# EAGLE board source_eagle (EAGLE 9.6.2)
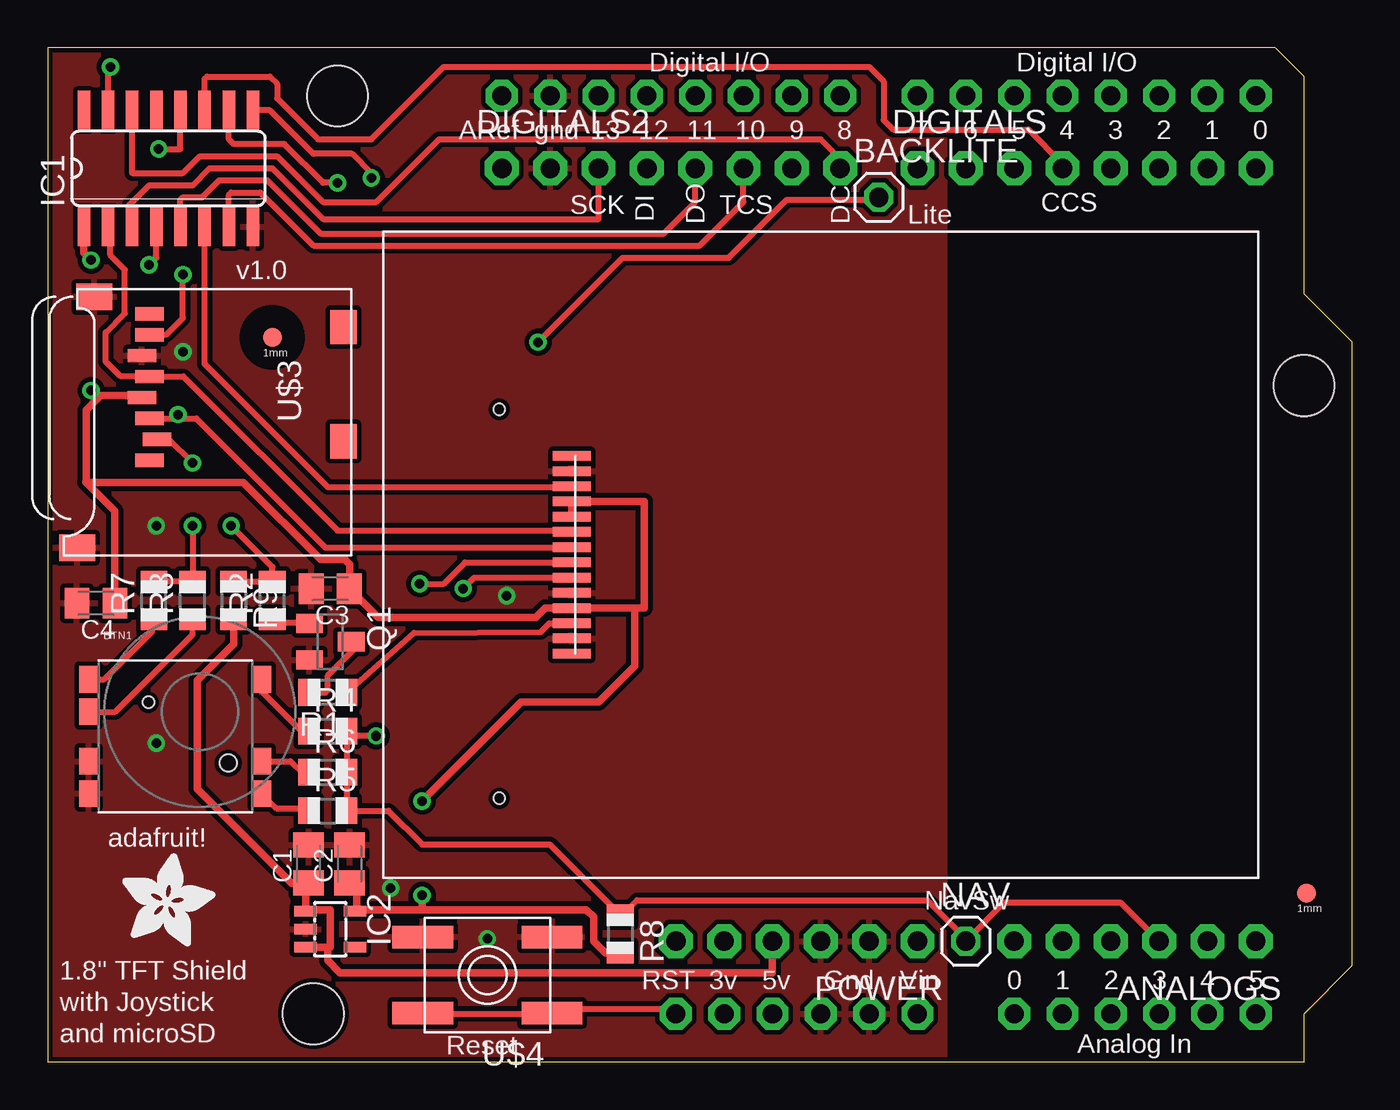
[diagram p0: board, top side]
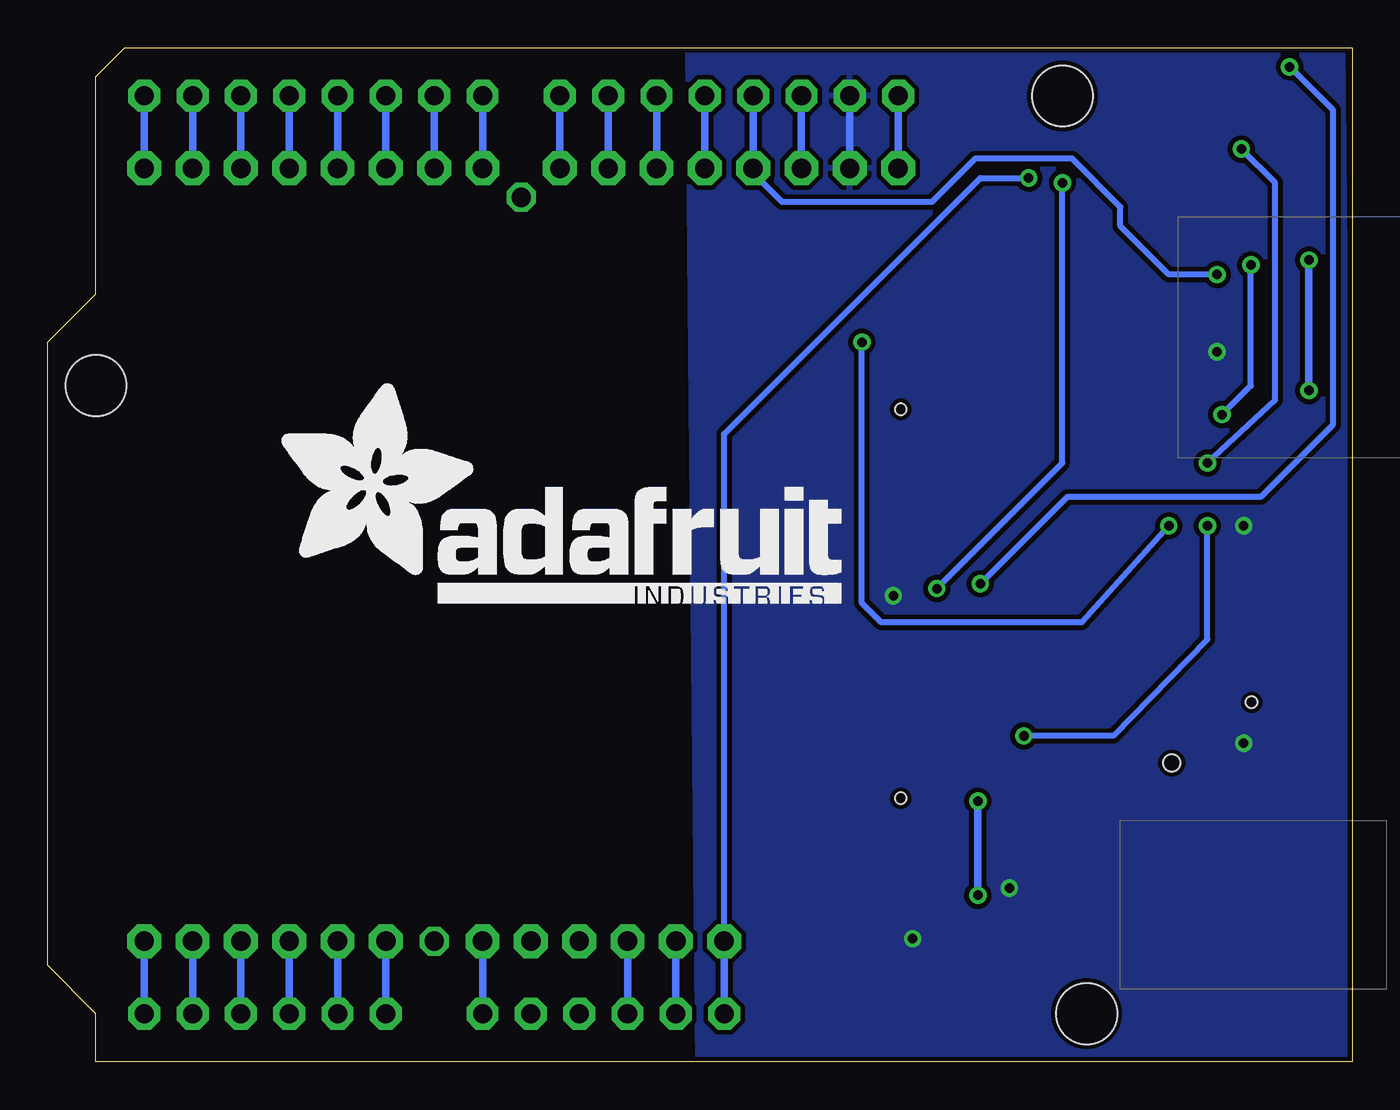
[diagram p1: board, bottom side, seen from below]

Size 68.58 x 53.34 mm. Coordinates in mm from the lower left corner, seen from the top.
Copper layers (1*16): Top 0.035mm / dielectric 1.5mm / Bottom 0.035mm
Design rules "10-10mil": minimum track width 10mil, minimum drill 19mil, track to track 10mil, track to pad 10mil, pad to pad 10mil, via to via 10mil, smd to smd 8mil, copper to edge 10mil, drill to drill 8mil, minimum pad ring 10mil, minimum via ring 8mil, stop-mask expansion 4mil, vias tented up to drill 20mil, thermal gap 10mil
Net classes: 1 power: width 0.406 mm

## Footprints (pad centres in the part's own frame; a part is rotated, then mirrored left to right if it is on the bottom)
1X06-CLEANBIG = drill 1.016 pad 1.778 octagon: 1 -6.35,0; 2 -3.81,0; 3 -1.27,0; 4 1.27,0; 5 3.81,0; 6 6.35,0
1X01 = drill 1.016 octagon: 1 0,0
SWITCH_4WAY_TPA511GLFS = smd 1 x 1.4: COMMON1 -5.825,-4.3; COMMON2 -5.825,-2.6; DOWN/4 3.25,-4.3; LEFT/7 -5.825,1.7; RIGHT/6 -5.825,0; SELECT/5 3.25,1.7; UP/3 3.25,-2.6 | hole 0.6: -2.7,0.5 | hole 0.9: 1.5,-2.7
C0805K = smd 1.3 x 1.6: 1 -1,0; 2 1,0
1X08-CLEANBIG = drill 1.016 pad 1.778 octagon: 1 -8.89,0; 2 -6.35,0; 3 -3.81,0; 4 -1.27,0; 5 1.27,0; 6 3.81,0; 7 6.35,0; 8 8.89,0
FIDUCIAL-1X2.5 = smd 1 x 1: 1 0,0
SO16 = smd 0.66 x 2.032: 1 -4.445,-3.073; 2 -3.175,-3.073; 3 -1.905,-3.073; 4 -0.635,-3.073; 5 0.635,-3.073; 6 1.905,-3.073; 7 3.175,-3.073; 8 4.445,-3.073; 9 4.445,3.073; 10 3.175,3.073; 11 1.905,3.073; 12 0.635,3.073; 13 -0.635,3.073; 14 -1.905,3.073; 15 -3.175,3.073; 16 -4.445,3.073
SOT23-5L = smd 0.55 x 1.2: 1 -0.95,-1.3; 2 0,-1.3; 3 0.95,-1.3; 4 0.95,1.3; 5 -0.95,1.3
SOT23-BEC = smd 1 x 1.4: B -0.95,-1.1; C 0,1.1; E 0.95,-1.1
R0805 = smd 1.1 x 1.4: 1 -1,0; 2 1,0
JD-T1800 = smd 0.5 x 2: 1 5.2,-13.1; 2 4.4,-13.1; 3 3.6,-13.1; 4 2.8,-13.1; 5 2,-13.1; 6 1.2,-13.1; 7 0.4,-13.1; 8 -0.4,-13.1; 9 -1.2,-13.1; 10 -2,-13.1; 11 -2.8,-13.1; 12 -3.6,-13.1; 13 -4.4,-13.1; 14 -5.2,-13.1 | hole 0.6: -7.65,-16.9; 12.8,-16.9
ARDUINO = drill 1 pad 1.676 octagon: 3V 35.56,2.54; 5V 38.1,2.54; A0 50.8,2.54; A1 53.34,2.54; A2 55.88,2.54; A3 58.42,2.54; A4 60.96,2.54; A5 63.5,2.54; AREF 23.876,50.8; D0 63.5,50.8; D1 60.96,50.8; D2 58.42,50.8; D3 55.88,50.8; D4 53.34,50.8; D5 50.8,50.8; D6 48.26,50.8; D7 45.72,50.8; D8 41.656,50.8; D9 39.116,50.8; D10 36.576,50.8; D11 34.036,50.8; D12 31.496,50.8; D13 28.956,50.8; GND 26.416,50.8; GND1 43.18,2.54; GND2 40.64,2.54; RESET 33.02,2.54; VIN 45.72,2.54 | hole 3.2: 15.24,50.8; 66.04,35.56; 13.97,2.54
MICROSD = smd 0.7 x 1.5: 1 9,-10.64; 2 7.9,-10.24; 3 6.8,-10.64; 4 5.7,-11.04; 5 4.6,-10.64; 6 3.5,-11.04; 7 2.4,-10.64; 8 1.3,-10.64 | smd 1.8 x 1.4: CD1 2,-0.44; CD2 8,-0.44 | smd 1.4 x 1.9: MT1 0.4,-13.54; MT2 13.6,-14.44
EVQ-Q2 = smd 3.2 x 1.2: A -3.4,-2; A' 3.4,-2; B -3.4,2; B' 3.4,2

## Placement (x,y rotation side)
ANALOGS  [1X06-CLEANBIG]  57.15,6.35 180 top
BACKLITE  [1X01]  43.69,45.47 0 top
BTN1  [SWITCH_4WAY_TPA511GLFS]  8,18.41 0 top
C1  10uF  [C0805K]  13.72,10.41 90 top
C2  10uF  [C0805K]  15.88,10.41 90 top
C3  0.1uF  [C0805K]  14.86,24.89 180 top
C4  0.1uF  [C0805K]  2.54,24.13 180 top
DIGITALS  [1X08-CLEANBIG]  54.61,46.99 0 top
DIGITALS2  [1X08-CLEANBIG]  32.77,46.99 0 top
FID1  FIDUCIAL1X2.5  [FIDUCIAL-1X2.5]  11.81,38.1 0 top
FID3  FIDUCIAL1X2.5  [FIDUCIAL-1X2.5]  66.17,8.89 0 top
IC1  4050D  [SO16]  6.35,46.99 0 top
IC2  RT9193-33GB  [SOT23-5L]  14.86,6.99 270 top
NAV  [1X01]  48.26,6.35 0 top
POWER  [1X06-CLEANBIG]  39.37,6.35 180 top
Q1  2N2222  [SOT23-BEC]  14.86,22.1 270 top
R1  22 ohm  [R0805]  14.73,19.43 180 top
R2  1K  [R0805]  11.81,24.26 90 top
R3  1.0K  [R0805]  7.62,24.26 90 top
R4  470 ohm  [R0805]  14.73,17.4 0 top
R5  220 ohm  [R0805]  14.73,13.21 0 top
R6  10K  [R0805]  14.73,15.24 0 top
R7  22 ohm  [R0805]  5.59,24.26 90 top
R8  1Kohm  [R0805]  30.1,6.73 270 top
R9  1K  [R0805]  9.78,24.26 270 top
U$1  JD-T1800  [JD-T1800]  40.64,26.67 270 top
U$2  ARDUINOUNO  [ARDUINO]  0,0 0 top
U$3  MICROSD  [MICROSD]  16,40.64 270 top
U$4  EVQQ2  [EVQ-Q2]  23.11,4.57 180 top
U$5  [ADAFRUIT_TEXT_30MM]  56.52,24.13 0 bottom
U$6  [ADAFRUIT_5MM]  3.94,6.1 0 top

## Library data of the parts
ANALOGS DIGITALS DIGITALS2 IC2 POWER R1-R9 U$1-U$4 = adafruit
BACKLITE NAV = pinhead
BTN1 FID1 FID3 U$5 U$6 = microbuilder
C1-C4 = rcl
IC1 = 40xx
Q1 = transistor

## Nets
+3V3 [power]: C2.1 C3.1 C4.1 IC1.1 IC2.5 R8.2 U$1.4 U$1.10 U$1.11 U$3.4
+5V [power]: C1.1 IC2.1 IC2.3 POWER.4 R9.2 U$2.5V
CARDCS: IC1.12 U$3.2
CARDCS_5V: DIGITALS.4 IC1.11 U$2.D4
GND: BTN1.COMMON1 BTN1.COMMON2 C1.2 C2.2 C3.2 C4.2 DIGITALS2.2 IC1.8 IC2.2 POWER.2 POWER.3 Q1.E U$1.2 U$1.5 U$1.13 U$2.GND U$2.GND1 U$2.GND2 U$3.6 U$3.MT1 U$3.MT2 U$4.A U$4.A'
MISO: DIGITALS2.4 U$2.D12 U$3.7
MOSI: IC1.4 U$1.8 U$3.3
MOSI_5V: DIGITALS2.5 IC1.5 U$2.D11
N$1: Q1.B R2.1
N$2: BTN1.LEFT/7 R7.1
N$3: BTN1.DOWN/4 R5.1
N$4: R1.1 U$1.3
N$5: Q1.C R1.2
N$6: DIGITALS2.7 U$2.D9
N$7: BTN1.SELECT/5 R4.1
N$8: BTN1.RIGHT/6 R3.1
N$9: BTN1.UP/3 R6.1
N$10: ANALOGS.3 NAV.1 R3.2 R4.2 R5.2 R6.2 R7.2 R8.1 U$2.A3
N$11: DIGITALS.1 U$2.D7
N$12: DIGITALS.2 U$2.D6
N$13: DIGITALS.3 U$2.D5
N$14: DIGITALS.5 U$2.D3
N$15: DIGITALS.6 U$2.D2
N$16: DIGITALS.7 U$2.D1
N$17: DIGITALS.8 U$2.D0
N$18: DIGITALS2.1 U$2.AREF
N$19: ANALOGS.1 U$2.A5
N$20: ANALOGS.2 U$2.A4
N$21: ANALOGS.4 U$2.A2
N$22: ANALOGS.5 U$2.A1
N$23: ANALOGS.6 U$2.A0
N$24: POWER.1 U$2.VIN
N$25: POWER.5 U$2.3V
N$26: BACKLITE.1 R2.2 R9.1
RESET_5V: IC1.9 POWER.6 U$2.RESET U$4.B U$4.B'
SCK: IC1.2 U$1.9 U$3.5
SCK_5V: DIGITALS2.3 IC1.3 U$2.D13
TFTCS: IC1.6 U$1.12
TFTCS_5V: DIGITALS2.6 IC1.7 U$2.D10
TFTDC: IC1.15 U$1.7
TFTDC_5V: DIGITALS2.8 IC1.14 U$2.D8
TFTRESET: IC1.10 U$1.6

## Tracks (layer width: path | path; a pad name or v marks a point on that pad's centre or on a via)
+3V3  (via drill 0.5)
  Top 0.406: C4.1 3.54,28.97 2.03,30.48 | 2.03,30.48 2.03,34.29 2.67,34.92 | 2.67,34.92 2.79,35.05 4.85,35.05 U$3.4 | IC1.1 1.91,42.55 v2.29,42.16 | 2.67,34.92 v2.29,35.31 | C2.1 16.26,9.03 16.26,8 16.23,8 IC2.5 16.13,7.96 16.13,8 19.68,8 | R8.2 29.32,5.73 28.7,6.35 28.7,7.62 28.32,8 19.68,8 | U$1.11 27.55,29.47 27.56,29.46 27.54,29.45 U$1.10 U$1.11 31.37,29.46 31.37,23.88 30.86,23.88 | 27.56,23.88 27.81,23.88 | U$1.4 26.16,23.88 25.65,23.37 17.38,23.37 C3.1 15.88,24.91 15.88,26.16 15.62,26.42 14.35,26.42 10.29,30.48 2.14,30.48 2.02,30.5 2.03,30.48 | 27.56,23.88 U$1.4 | U$1.4 | 30.86,23.88 27.56,23.88 | 30.86,23.88 30.86,20.83 28.96,18.92 24.89,18.92 v19.68,13.72 | 19.68,8 v19.68,8.76
  Bottom 0.406: v2.29,35.31 v2.29,42.16 | v19.68,8.76 v19.68,13.72
+5V
  Top 0.406: 38.1,6.48 POWER.4 38.1,4.7 15.37,4.7 14.73,5.33 14.73,6.04 | 13.72,9.4 13.84,9.4 | IC2.3 14.73,6.04 | 14.73,6.04 14.86,6.04 14.86,8 13.56,8 | 13.56,8 13.46,8 | 13.56,8 IC2.1 | R9.2 9.78,21.97 7.87,20.07 7.87,14.35 12.83,9.4 13.72,9.4 | 13.7,9.4 C1.1 13.72,9.4 | 13.56,8 13.56,9.24 13.72,9.4
  Bottom 0.406: POWER.4 U$2.5V
CARDCS  (via drill 0.5)
  Top 0.305: IC1.12 6.99,48.01 v5.84,48.01 | v7.62,31.5 6.35,32.77 5.59,32.77 5.61,32.74 U$3.2
  Bottom 0.305: v5.84,48.01 4.06,46.23 4.06,34.8 v7.62,31.5
CARDCS_5V
  Top 0.305: IC1.11 8.26,51.69 8.38,51.82 11.68,51.82 12.06,51.44 12.06,50.67 14.22,48.51 17.02,48.51 20.83,52.32 43.18,52.32 43.94,51.56 43.94,49.53 44.45,49.02 51.56,49.02 53.34,47.24 DIGITALS.4
  Bottom 0.406: DIGITALS.4 U$2.D4
GND  (via drill 0.5)
  Bottom 0.406: U$2.GND 26.67,50.8 26.42,50.55 DIGITALS2.2
  other vias: 23.11,6.48 7.11,37.34 24.13,24.51 5.71,16.76 5.71,28.19 18.03,9.14
  pour Top: 0,0 0.25,53.34 47.12,52.96 47.12,-0.38
  pour Bottom: 0,0 0.51,53.59 34.92,53.34 34.42,-0.25
MISO  (via drill 0.5)
  Top 0.305: U$3.7 6.24,38.24 7.11,39.12 v7.11,41.4
  Bottom 0.305: v7.11,41.4 9.65,41.4 12.19,43.94 12.19,44.96 14.73,47.5 19.81,47.5 22.1,45.21 29.97,45.21 31.5,46.74 DIGITALS2.4
  Bottom 0.406: U$2.D12 31.75,50.8 31.5,50.55 DIGITALS2.4
MOSI  (via drill 0.5)
  Top 0.305: U$3.3 6.86,33.84 | 6.86,33.84 7.82,33.84 14.61,27.05 27.52,27.05 U$1.8 | IC1.4 5.71,42.29 v5.33,41.91 | 6.86,33.84 6.86,33.78 | 6.86,33.84 v6.86,34.04
  Bottom 0.305: v5.33,41.91 5.33,35.56 v6.86,34.04
MOSI_5V
  Top 0.305: IC1.5 6.99,45.34 7.11,45.47 8.13,45.47 9.02,46.35 11.56,46.35 14.35,43.56 32.38,43.56 34.04,45.21 DIGITALS2.5
  Bottom 0.406: U$2.D11 34.29,50.8 34.04,50.55 DIGITALS2.5
N$1
  Top 0.305: Q1.B 13.72,23.09 13.72,23.11 11.95,23.11 R2.1
N$2
  Top 0.305: R7.1 5.48,22.62 2.97,20.11 BTN1.LEFT/7
N$3
  Top 0.305: R5.1 13.72,13.22 13.72,13.34 12.03,13.34 BTN1.DOWN/4
N$4
  Top 0.305: R1.1 15.75,19.43 19.26,22.56 25.91,22.61 26.37,23.07 U$1.3
N$5
  Top 0.305: R1.2 13.97,19.56 14.1,19.43 14.61,19.43 14.73,19.56 14.73,20.32 16.13,21.72 16.13,22.1 Q1.C 16,22.1
N$6
  Bottom 0.406: U$2.D9 39.37,50.8 39.12,50.55 DIGITALS2.7
N$7
  Top 0.305: R4.1 13.59,17.4 13.46,17.27 11.25,19.48 BTN1.SELECT/5
N$8
  Top 0.305: BTN1.RIGHT/6 3.56,18.41 7.62,22.48 7.64,23.24 | 7.64,23.24 7.75,23.24 | 7.64,23.24 R3.1
N$9
  Top 0.305: R6.1 13.34,15.24 12.76,15.81 BTN1.UP/3
N$10  (via drill 0.5)
  Top 0.305: 5.57,25.27 5.46,25.27 | 5.57,25.27 R7.2 | 5.57,25.27 7.6,25.27 R3.2 v7.62,28.19 | 58.42,6.22 ANALOGS.3 56.39,8.38 50.29,8.38 NAV.1 48.26,6.48 46.23,8.51 30.99,8.51 30.21,7.73 R8.1 26.4,11.43 19.68,11.43 17.91,13.21 R5.2 | R5.2 15.62,13.21 | R6.2 R5.2 | R6.2 15.73,15.37 15.75,15.37 | 15.73,17.27 R4.2 15.73,17.16 15.75,17.14 v17.27,17.14 | 15.73,17.27 R6.2 | 15.73,17.27 15.75,17.27
  Bottom 0.305: v7.62,28.19 7.62,22.23 12.57,17.14 v17.27,17.14
  Bottom 0.406: ANALOGS.3 U$2.A3
N$11
  Bottom 0.406: DIGITALS.1 U$2.D7
N$12
  Bottom 0.406: DIGITALS.2 U$2.D6
N$13
  Bottom 0.406: DIGITALS.3 U$2.D5
N$14
  Bottom 0.406: DIGITALS.5 U$2.D3
N$15
  Bottom 0.406: DIGITALS.6 U$2.D2
N$16
  Bottom 0.406: DIGITALS.7 U$2.D1
N$17
  Bottom 0.406: DIGITALS.8 U$2.D0
N$18
  Bottom 0.406: U$2.AREF 24.13,50.8 23.88,50.55 DIGITALS2.1
N$19
  Bottom 0.406: U$2.A5 ANALOGS.1
N$20
  Bottom 0.406: U$2.A4 ANALOGS.2
N$21
  Bottom 0.406: U$2.A2 ANALOGS.4
N$22
  Bottom 0.406: U$2.A1 ANALOGS.5
N$23
  Bottom 0.406: U$2.A0 ANALOGS.6
N$24
  Bottom 0.406: U$2.VIN POWER.1
N$25
  Bottom 0.406: U$2.3V POWER.5
N$26  (via drill 0.5)
  Top 0.305: R9.1 9.79,25.27 11.81,25.27 R2.2 11.81,26.04 v9.65,28.19 | v25.78,37.85 30.23,42.29 35.81,42.29 38.86,45.34 43.69,45.34 BACKLITE.1
  Bottom 0.305: v9.65,28.19 14.22,23.11 24.77,23.11 25.78,24.13 v25.78,37.85
RESET_5V  (via drill 0.5)
  Top 0.305: U$4.B' 19.75,2.54 26.48,2.54 U$4.B 26.74,2.79 32.77,2.79 U$2.RESET | IC1.9 10.82,50.04 11.68,50.04 13.97,47.75 16,47.75 17.02,46.74 v17.02,46.48
  Bottom 0.305: POWER.6 33.02,33.02 19.56,46.48 v17.02,46.48
  Bottom 0.406: U$2.RESET POWER.6
SCK
  Top 0.305: U$1.9 27.62,27.87 27.69,27.94 15.24,27.94 7.14,36.04 U$3.5 5.33,36.07 3.81,36.07 3.05,36.83 3.05,38.35 4.06,39.37 4.06,41.66 3.3,42.42 3.3,43.79 IC1.2
SCK_5V
  Top 0.305: IC1.3 4.45,44.7 4.32,44.7 4.32,45.09 5.33,46.1 7.62,46.1 8.51,46.99 11.81,46.99 14.48,44.32 28.96,44.32 DIGITALS2.3 28.96,47.24
  Bottom 0.406: U$2.D13 29.21,50.8 28.96,50.55 DIGITALS2.3
TFTCS
  Top 0.305: IC1.6 8.26,36.7 14.73,30.23 27.94,30.23 27.9,30.27 U$1.12
TFTCS_5V
  Top 0.305: IC1.7 9.53,45.59 9.65,45.72 11.18,45.72 13.97,42.93 34.29,42.93 36.58,45.21 DIGITALS2.6
  Bottom 0.406: U$2.D10 36.83,50.8 36.58,50.55 DIGITALS2.6
TFTDC  (via drill 0.5)
  Top 0.305: U$1.7 21.95,26.27 20.83,25.15 v19.56,25.15 | IC1.15 3.17,52.2 v3.3,52.32
  Bottom 0.305: v3.3,52.32 1.02,50.04 1.02,33.53 4.83,29.72 14.99,29.72 v19.56,25.15
TFTDC_5V
  Top 0.305: DIGITALS2.8 41.91,47.24 40.64,48.51 20.57,48.51 17.27,45.21 14.48,45.21 12.06,47.62 8,47.62 7.11,46.74 4.45,46.74 IC1.14
  Bottom 0.406: U$2.D8 41.91,50.8 41.66,50.55 DIGITALS2.8
TFTRESET  (via drill 0.5)
  Top 0.305: U$1.6 22.42,25.47 v21.84,24.89 | v15.24,46.23 14.48,46.23 12.45,48.26 9.78,48.26 9.53,48.51 IC1.10
  Bottom 0.305: v21.84,24.89 15.24,31.5 v15.24,46.23

## Text on the board
tPlace: SCK | TCS | CCS | DI | DO | DC | Lite | v1.0 | adafruit! | NavSw | 1.8" TFT Shield | with Joystick | and microSD | Reset